# Altium PCB MB1710051255.PcbDoc (part 3 of 4)
Units mm, origin at the board's own origin, x right, y up, seen from the top; angles counter-clockwise.
Board outline 209.55 x 153.67 mm, 2 copper layers (Top Layer, Bottom Layer); 288 components, 212 nets, 1030 pads, 414 vias.
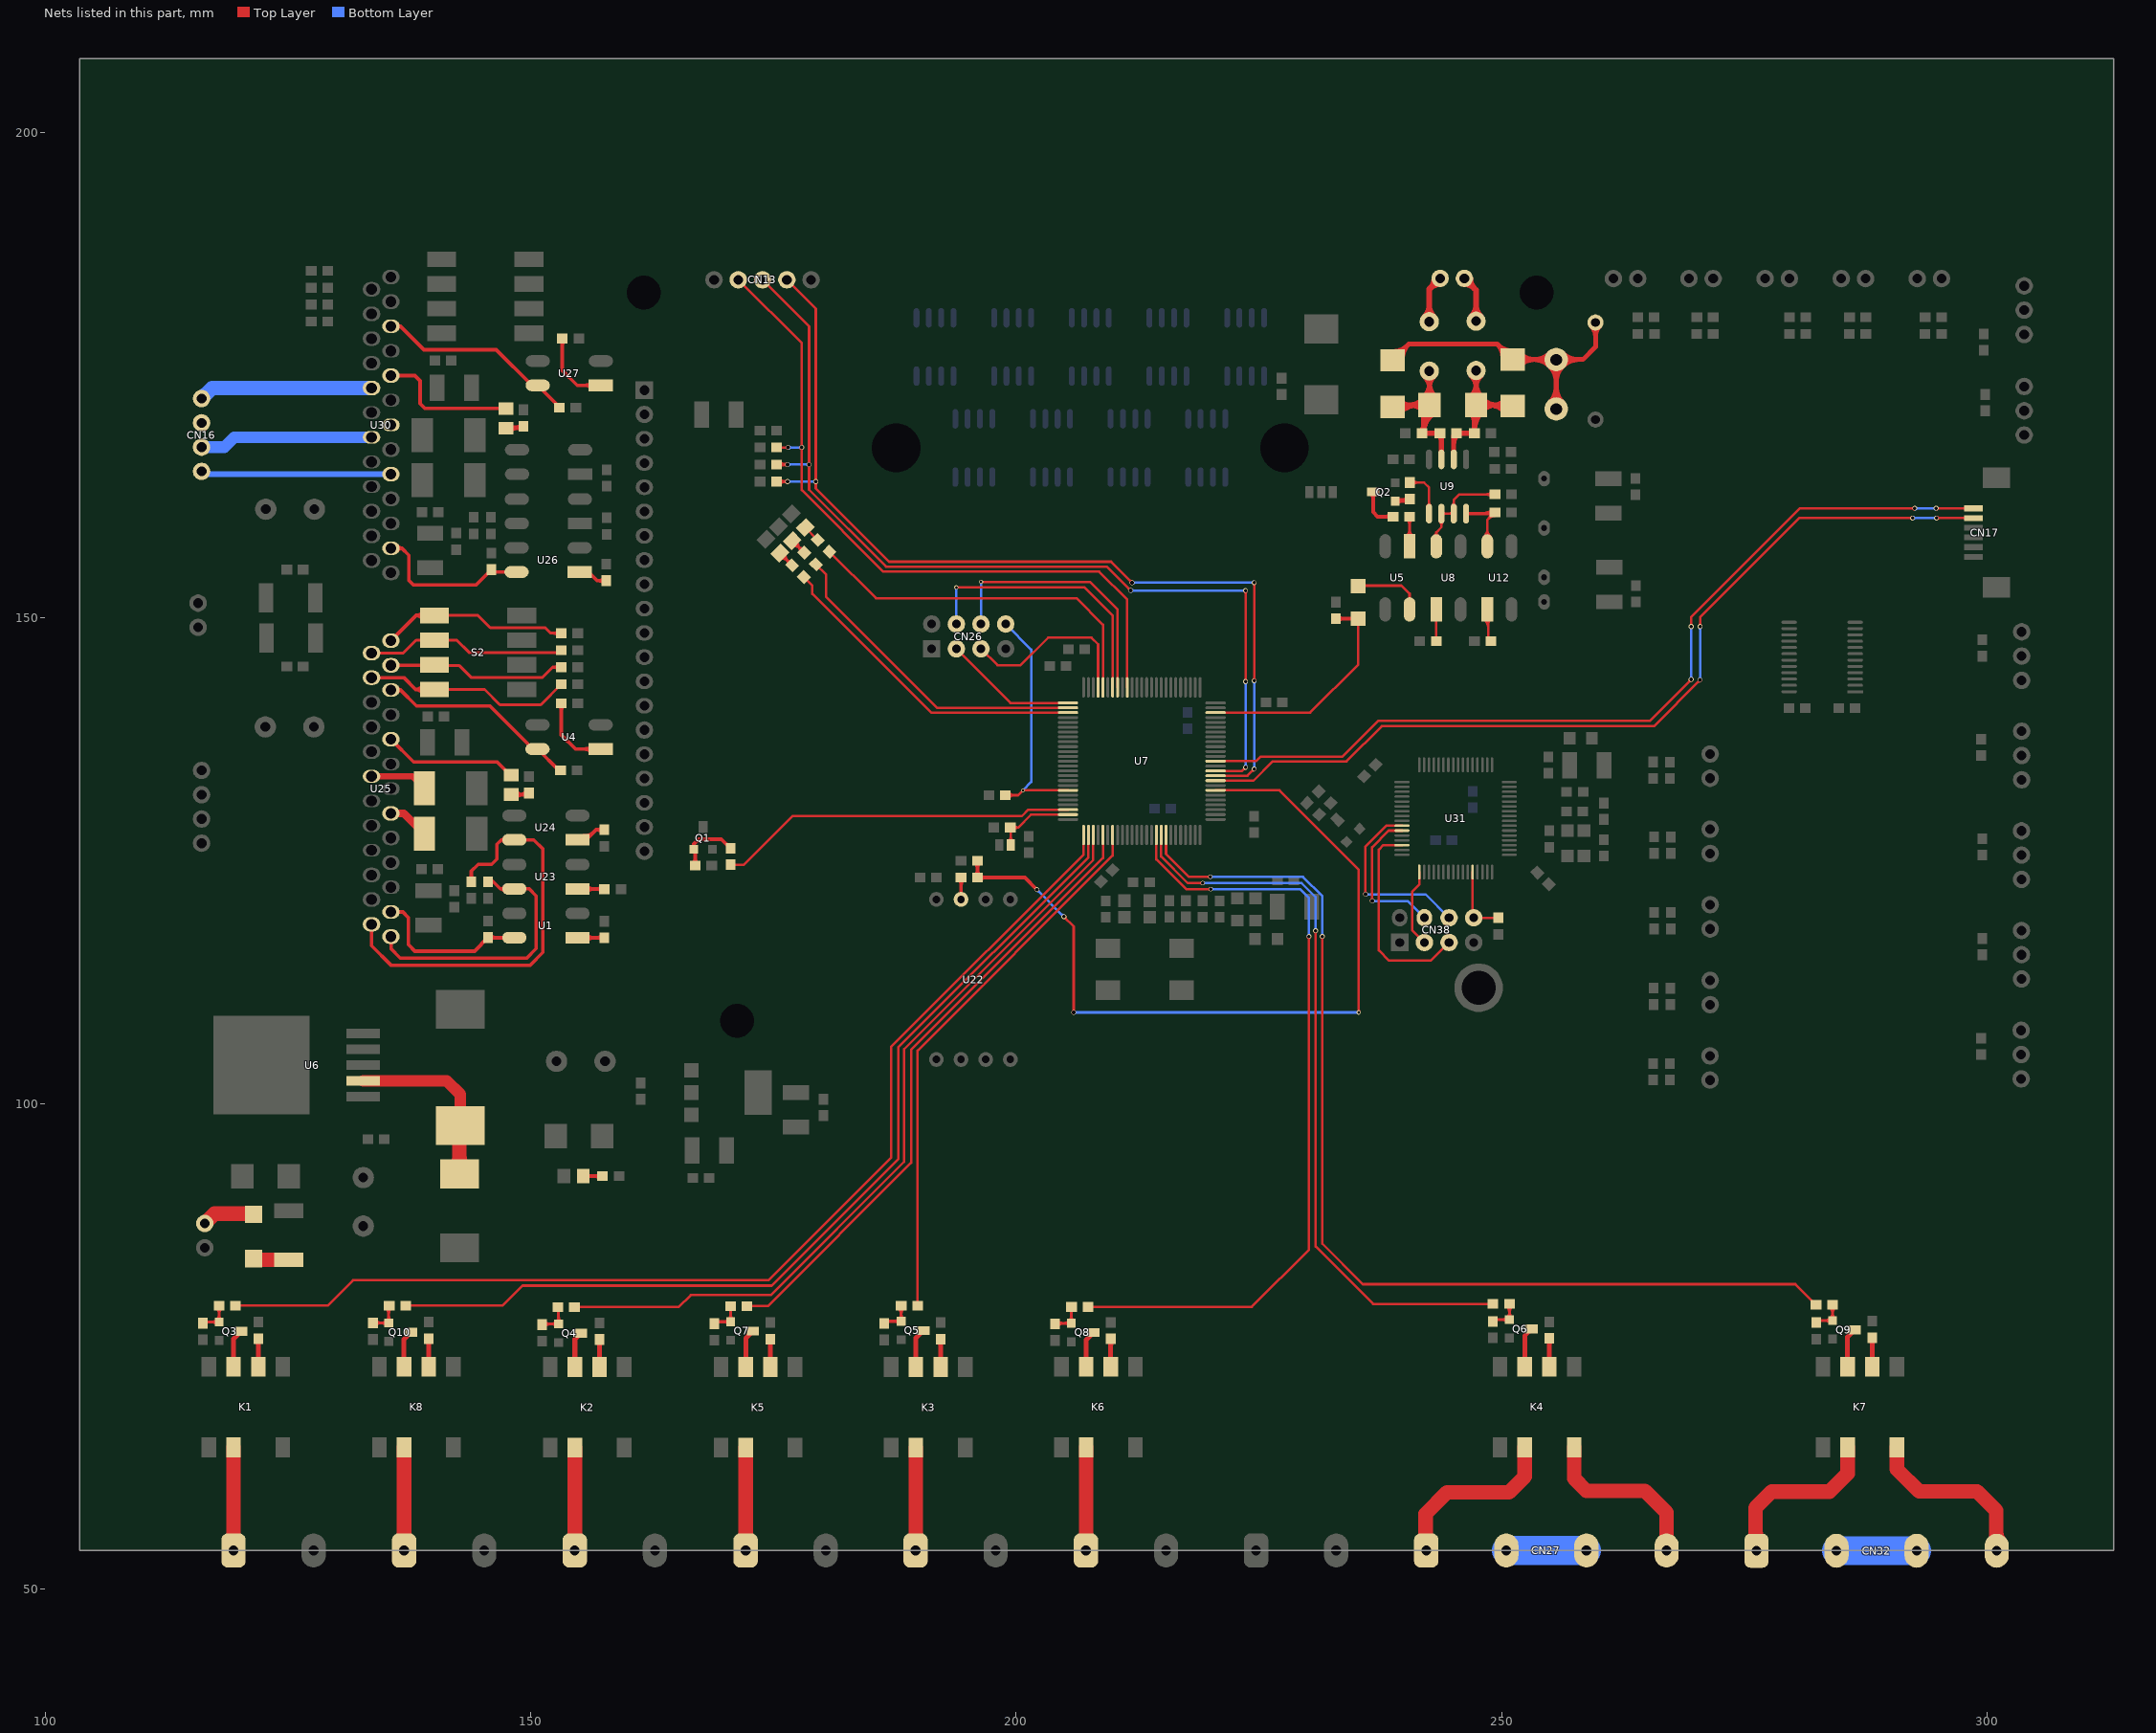
[diagram p3: the nets of this part, all layers, seen from the top]

## Via types
v1: diameter 0.7, hole 0.5, Top Layer to Bottom Layer, 231 vias
v2: diameter 0.5, hole 0.38, Top Layer to Bottom Layer, 67 vias
v3: diameter 0.5, hole 0.35, Top Layer to Bottom Layer, 64 vias
v4: diameter 0.42, hole 0.3, Top Layer to Bottom Layer, 27 vias
v5: diameter 0.45, hole 0.32, Top Layer to Bottom Layer, 8 vias
v6: diameter 0.8, hole 0.6, Top Layer to Bottom Layer, 8 vias
v7: diameter 1, hole 0.8, Top Layer to Bottom Layer, 4 vias
v8: diameter 0.45, hole 0.35, Top Layer to Bottom Layer, 3 vias
v9: diameter 1.2, hole 1, Top Layer to Bottom Layer, 1 vias
v10: diameter 0.6, hole 0.45, Top Layer to Bottom Layer, 1 vias

## Nets (pads, with @x,y where several pads share a name; then routed paths per layer and width w, separated by ;. In a path a pad name is that pad's centre, name@x,y a point inside that pad or via, vN(x,y) a via of type N, cw(c..) or ccw(c..) an arc to the next point about the centre after c; other vN are vias at no path point) (continued)
NetCN13_2: CN13.2 R16.1 U7.66 | length 76.5
  Top Layer w0.254: CN13.2@171.37,184.844 177.902,178.312 177.902,163.195 186.309,154.788 208.534,154.788 211.428,151.893 U7.66@211.428,142.855 ; R16.1@175.311,167.564 v2(176.505,167.564) ; v2@176.418,167.477 ccw(c176.208,167.267) 176.208,167.564 ccw(c176.208,167.861) v2@176.418,167.651 ; v2@177.815,167.477 cw(c177.605,167.267) 177.902,167.267 cw(c178.199,167.267) v2@177.989,167.477 ; v2@177.815,167.651 ccw(c177.605,167.861) 177.902,167.861 ccw(c178.199,167.861) v2@177.989,167.651
  Bottom Layer w0.254: v2(176.505,167.564) v2(177.902,167.564) ; v2@176.592,167.477 cw(c176.802,167.267) 176.802,167.564 cw(c176.802,167.861) v2@176.592,167.651 ; v2@177.815,167.477 ccw(c177.605,167.267) 177.605,167.564 ccw(c177.605,167.861) v2@177.815,167.651
NetCN13_3: CN13.3 R17.1 U7.36 | length 105.9
  Top Layer w0.254: CN13.3@173.87,184.844 178.664,180.05 178.664,163.22 186.588,155.296 209.321,155.296 v2(211.785,152.832) ; R17.1@175.311,165.811 v2(176.428,165.811) ; R17.1@175.625,165.547 cw(c176.261,164.911) 176.261,165.811 cw(c176.261,166.712) R17.1@175.625,166.075 ; 176.03,165.749 cw(c176.145,165.32) v2@176.367,165.705 ; 176.03,165.873 ccw(c176.145,166.303) v2@176.367,165.918 ; v2@176.341,165.724 ccw(c176.131,165.514) 176.131,165.811 ccw(c176.131,166.108) v2@176.341,165.898 ; v2@178.577,165.724 cw(c178.367,165.514) 178.664,165.514 cw(c178.961,165.514) v2@178.751,165.724 ; v2@178.577,165.898 ccw(c178.367,166.108) 178.664,166.108 ccw(c178.961,166.108) v2@178.751,165.898 ; v2@211.662,152.832 ccw(c211.365,152.832) 211.575,153.042 ccw(c211.785,153.252) v2@211.785,152.955 ; U7.36@220.528,134.255 223.257,134.255 v3(223.622,134.62) ; v3@223.499,134.62 cw(c223.202,134.62) 223.412,134.41 cw(c223.622,134.2) v3@223.622,134.497 ; v3@223.535,143.546 ccw(c223.325,143.756) 223.622,143.756 ccw(c223.919,143.756) v3@223.709,143.546 ; v3@223.535,152.745 cw(c223.325,152.535) 223.622,152.535 cw(c223.919,152.535) v3@223.709,152.745 ; v3(223.622,143.459) v3(223.622,152.832)
  Bottom Layer w0.254: v2(176.428,165.811) v2(178.664,165.811) ; v2@176.515,165.724 cw(c176.725,165.514) 176.725,165.811 cw(c176.725,166.108) v2@176.515,165.898 ; v2@178.577,165.724 ccw(c178.367,165.514) 178.367,165.811 ccw(c178.367,166.108) v2@178.577,165.898 ; v2(211.785,152.832) v3(223.622,152.832) ; v2@211.872,152.745 cw(c212.082,152.535) 212.082,152.832 cw(c212.082,153.129) v2@211.872,152.919 ; v3@223.535,134.707 ccw(c223.325,134.917) 223.622,134.917 ccw(c223.919,134.917) v3@223.709,134.707 ; v3@223.535,143.372 cw(c223.325,143.162) 223.622,143.162 cw(c223.919,143.162) v3@223.709,143.372 ; v3@223.535,152.745 ccw(c223.325,152.535) 223.325,152.832 ccw(c223.325,153.129) v3@223.535,152.919 ; v3(223.622,134.62) v3(223.622,143.459)
NetCN13_4: CN13.4 R23.1 U7.35 | length 107.6
  Top Layer w0.254: R23.1@175.311,164.059 v2(176.428,164.059) ; R23.1@175.625,163.795 cw(c176.261,163.158) 176.261,164.059 cw(c176.261,164.959) R23.1@175.625,164.322 ; 176.03,163.996 cw(c176.145,163.567) v2@176.367,163.952 ; 176.03,164.121 ccw(c176.145,164.55) v2@176.367,164.165 ; v2@176.341,163.972 ccw(c176.131,163.762) 176.131,164.059 ccw(c176.131,164.356) v2@176.341,164.146 ; CN13.4@176.37,184.844 179.349,181.864 179.349,163.347 186.893,155.804 209.779,155.804 v2(211.938,153.645) ; v2@179.262,163.972 cw(c179.052,163.762) 179.349,163.762 cw(c179.646,163.762) v2@179.436,163.972 ; v2@179.262,164.146 ccw(c179.052,164.356) 179.349,164.356 ccw(c179.646,164.356) v2@179.436,164.146 ; v2@211.815,153.645 ccw(c211.518,153.645) 211.728,153.855 ccw(c211.938,154.065) v2@211.938,153.768 ; U7.35@220.528,133.755 223.823,133.755 v3(224.511,134.442) ; v3@224.388,134.442 cw(c224.091,134.442) 224.301,134.232 cw(c224.511,134.022) v3@224.511,134.319 ; v3@224.424,143.622 ccw(c224.214,143.832) 224.511,143.832 ccw(c224.808,143.832) v3@224.598,143.622 ; v3@224.424,153.558 cw(c224.214,153.348) 224.511,153.348 cw(c224.808,153.348) v3@224.598,153.558 ; v3(224.511,143.535) v3(224.511,153.645)
  Bottom Layer w0.254: v2(176.428,164.059) v2(179.349,164.059) ; v2@176.515,163.972 cw(c176.725,163.762) 176.725,164.059 cw(c176.725,164.356) v2@176.515,164.146 ; v2@179.262,163.972 ccw(c179.052,163.762) 179.052,164.059 ccw(c179.052,164.356) v2@179.262,164.146 ; v2(211.938,153.645) v3(224.511,153.645) ; v2@212.025,153.558 cw(c212.235,153.348) 212.235,153.645 cw(c212.235,153.942) v2@212.025,153.732 ; v3@224.424,134.529 ccw(c224.214,134.739) 224.511,134.739 ccw(c224.808,134.739) v3@224.598,134.529 ; v3@224.424,143.448 cw(c224.214,143.238) 224.511,143.238 cw(c224.808,143.238) v3@224.598,143.448 ; v3@224.424,153.558 ccw(c224.214,153.348) 224.214,153.645 ccw(c224.214,153.942) v3@224.424,153.732 ; v3(224.511,134.442) v3(224.511,143.535)
NetCN16_1: CN16.1 U30.16 | length 18
  Bottom Layer w1.5: CN16.1@116.086,172.608 117.18,173.702 U30.16@133.592,173.702
NetCN16_2: CN16.2 U30.13 | length 0.3
  Bottom Layer w0.6: CN16.2@116.086,170.108 CN16.2@116.302,169.892
NetCN16_3: CN16.3 U30.12 | length 17.9
  Bottom Layer w1.2: CN16.3@116.086,167.608 118.433,167.608 119.448,168.622 U30.12@133.592,168.622
NetCN16_4: CN16.4 U30.9 | length 19.6
  Bottom Layer w0.6: CN16.4@116.086,165.108 116.382,164.812 U30.9@135.592,164.812
NetCN17_5: CN17.5 U7.34 | length 97.5
  Top Layer w0.254: U7.34@220.528,133.255 224.441,133.255 226.416,135.23 234.01,135.23 237.635,138.854 265.676,138.854 v2(270.434,143.612) ; v2@270.311,143.612 cw(c270.014,143.612) 270.224,143.402 cw(c270.434,143.192) v2@270.434,143.489 ; v3@270.347,149.21 ccw(c270.137,149.42) 270.434,149.42 ccw(c270.731,149.42) v3@270.521,149.21 ; v3(270.434,149.123) 270.434,150.089 280.646,160.301 v3(292.33,160.301) ; v3@292.243,160.214 ccw(c292.033,160.004) 292.033,160.301 ccw(c292.033,160.598) v3@292.243,160.388 ; v3@294.792,160.299 v3(294.794,160.301) CN17.5@298.596,160.301 ; v3@294.881,160.214 cw(c295.091,160.004) 295.091,160.301 cw(c295.091,160.598) v3@294.881,160.388 ; CN17.5@297.823,160.178 ccw(c297.528,159.883) 297.528,160.301 ccw(c297.528,160.718) CN17.5@297.823,160.423
  Bottom Layer w0.254: v2@270.347,143.699 ccw(c270.137,143.909) 270.434,143.909 ccw(c270.731,143.909) v2@270.521,143.699 ; v3@270.347,149.036 cw(c270.137,148.826) 270.434,148.826 cw(c270.731,148.826) v3@270.521,149.036 ; v2(270.434,143.612) v3(270.434,149.123) ; v3@292.329,160.299 v3(292.33,160.301) v3(294.794,160.301) ; v3@292.417,160.214 cw(c292.627,160.004) 292.627,160.301 cw(c292.627,160.598) v3@292.417,160.388 ; v3@294.707,160.214 ccw(c294.497,160.004) 294.497,160.301 ccw(c294.497,160.598) v3@294.707,160.388
NetCN17_6: CN17.6 U7.38 | length 97
  Top Layer w0.254: U7.38@220.528,135.255 224.688,135.255 225.171,135.738 233.604,135.738 237.274,139.408 265.265,139.408 v2(269.519,143.662) ; v2@269.396,143.662 cw(c269.099,143.662) 269.309,143.452 cw(c269.519,143.242) v2@269.519,143.539 ; v3@269.432,149.21 ccw(c269.222,149.42) 269.519,149.42 ccw(c269.816,149.42) v3@269.606,149.21 ; v3(269.519,149.123) 269.519,150.114 280.706,161.301 v3(292.543,161.301) ; v3@292.456,161.214 ccw(c292.246,161.004) 292.246,161.301 ccw(c292.246,161.598) v3@292.456,161.388 ; v3(294.752,161.301) CN17.6@298.596,161.301 ; v3@294.839,161.214 cw(c295.049,161.004) 295.049,161.301 cw(c295.049,161.598) v3@294.839,161.388 ; CN17.6@297.823,161.178 ccw(c297.528,160.883) 297.528,161.301 ccw(c297.528,161.718) CN17.6@297.823,161.423
  Bottom Layer w0.254: v2@269.432,143.749 ccw(c269.222,143.959) 269.519,143.959 ccw(c269.816,143.959) v2@269.606,143.749 ; v3@269.432,149.036 cw(c269.222,148.826) 269.519,148.826 cw(c269.816,148.826) v3@269.606,149.036 ; v2(269.519,143.662) v3(269.519,149.123) ; v3@292.532,161.29 v3(292.543,161.301) v3(294.752,161.301) ; v3@292.63,161.214 cw(c292.84,161.004) 292.84,161.301 cw(c292.84,161.598) v3@292.63,161.388 ; v3@294.665,161.214 ccw(c294.455,161.004) 294.455,161.301 ccw(c294.455,161.598) v3@294.665,161.388
NetCN24_2: CN24.2 D2.1 | length 5.4
  Top Layer w1.5: CN24.2@116.408,87.635 117.419,88.646 D2.1@121.437,88.646
NetCN25_1: CN25.1 RT1.2 | length 9.8
  Top Layer w0.6: RT1.2@242.048,181.012 ccw(c240.869,182.191) 242.536,182.191 ccw(c244.204,182.191) RT1.2@243.025,181.012 ; RT1.2@242.536,180.524 242.536,183.868 CN25.1@243.657,184.988 ; CN25.1@243.057,184.988 cw(c241.608,184.988) 242.633,183.964 cw(c243.657,182.94) CN25.1@243.657,184.388
NetCN25_2: CN25.2 RT2.2 | length 9.8
  Top Layer w0.6: CN25.2@246.157,184.388 cw(c246.157,182.94) 247.181,183.964 cw(c248.205,184.988) CN25.2@246.757,184.988 ; CN25.2@246.157,184.988 247.362,183.783 RT2.2@247.362,180.575 ; RT2.2@246.874,181.063 ccw(c245.695,182.242) 247.362,182.242 ccw(c249.03,182.242) RT2.2@247.851,181.063
NetCN26_2: CN26.2 U7.76 | length 13.8
  Top Layer w0.254: CN26.2@193.827,146.837 199.41,141.255 U7.76@205.328,141.255
NetCN26_3: CN26.3 U7.72 | length 18.7
  Top Layer w0.254: CN26.3@196.367,146.837 198.069,145.136 200.431,145.136 203.276,147.98 207.747,147.98 208.428,147.299 U7.72@208.428,142.855
NetCN26_6: CN26.6 U7.69 | length 28.5
  Top Layer w0.254: v4(193.827,153.162) 207.035,153.162 209.928,150.269 U7.69@209.928,142.855
  Bottom Layer w0.254: CN26.6@193.827,149.377 v4(193.827,153.162)
NetCN26_7: CN26.7 U7.68 | length 27.6
  Top Layer w0.254: v4(196.367,153.721) 207.569,153.721 210.428,150.861 U7.68@210.428,142.855
  Bottom Layer w0.254: CN26.7@196.367,149.377 v4(196.367,153.721)
NetCN26_8: CN26.8 R44.2 U7.94 | length 26.6
  Top Layer w0.254: R44.2@198.88,131.75 200.177,131.75 v4(200.683,132.255) U7.94@205.328,132.255 ; R44.2@199.194,131.486 cw(c199.831,130.849) 199.831,131.75 cw(c199.831,132.65) R44.2@199.194,132.014
  Bottom Layer w0.254: CN26.8@198.907,149.377 201.549,146.736 201.549,133.121 v4(200.683,132.255)
NetCN27_1: CN27.1 K4.6 | length 19.7
  Top Layer w1.5: 242.164,55.819 ccw(c243.596,55.819) CN27.1@242.583,54.806 ; CN27.1@242.23,53.953 242.164,54.019 242.164,57.737 244.373,59.947 250.749,59.947 252.374,61.573 K4.6@252.374,64.586
NetCN27_2: CN27.2 CN27.3 | length 8.2
  Bottom Layer w3: CN27.2@250.48,53.953 CN27.3@258.73,53.953
NetCN27_4: CN27.4 K4.8 | length 18.1
  Top Layer w1.5: K4.8@257.454,64.586 257.454,61.37 258.724,60.1 264.744,60.1 266.98,57.864 CN27.4@266.98,53.953
NetCN28_1: CN28.1 K1.6 | length 10.6
  Top Layer w1.5: CN28.1@119.37,53.953 119.38,53.963 K1.6@119.38,64.586
NetCN29_1: CN29.1 K2.6 | length 10.6
  Top Layer w1.5: CN29.1@154.523,53.953 154.534,53.963 K2.6@154.534,64.561
NetCN30_1: CN30.1 K3.6 | length 11.7
  Top Layer w1.5: CN30.1@189.273,54.807 ccw(c188.333,55.746) 189.662,55.746 ; CN30.1@189.626,53.953 189.662,53.989 K3.6@189.662,64.561
NetCN32_1: CN32.1 K7.6 | length 19.3
  Top Layer w1.5: 276.149,55.855 ccw(c277.668,55.855) CN32.1@276.594,54.781 ; CN32.1@276.24,53.927 276.149,54.019 276.149,58.347 277.825,60.023 283.769,60.023 285.623,61.878 K7.6@285.623,64.586
NetCN32_2: CN32.2 CN32.3 | length 8.2
  Bottom Layer w3: CN32.2@284.49,53.927 CN32.3@292.74,53.927
NetCN32_4: CN32.4 K7.8 | length 19.5
  Top Layer w1.5: K7.8@290.703,64.586 290.703,62.335 292.989,60.049 298.958,60.049 300.939,58.068 300.939,53.978 CN32.4@300.99,53.927 ; 300.939,55.758 ccw(c302.32,55.758) CN32.4@301.344,54.781
NetCN33_1: CN33.1 K5.6 | length 10.6
  Top Layer w1.5: CN33.1@172.126,53.953 172.136,53.963 K5.6@172.136,64.561
NetCN34_1: CN34.1 K6.6 | length 10.6
  Top Layer w1.5: CN34.1@207.178,53.953 207.188,53.963 K6.6@207.188,64.586
NetCN35_1: CN35.1 K8.6 | length 10.6
  Top Layer w1.5: K8.6@136.931,64.586 136.931,53.968 CN35.1@136.947,53.953
NetCN37_2: CN37.2 R80.2 U7.99 | length 10.4
  Top Layer w0.254: CN37.2@199.224,127.006 ccw(c198.724,127.506) 199.431,127.506 ccw(c200.139,127.506) CN37.2@199.638,127.006 ; CN37.2@199.431,126.619 199.431,128.379 R80.2@199.388,128.422 200.177,128.422 ; R80.2@199.738,128.201 cw(c200.177,127.877) 200.177,128.422 ; R80.2@199.738,128.644 ccw(c200.177,128.968) 200.177,128.422 ; U7.99@205.328,129.755 201.51,129.755 200.177,128.422
NetCN38_2: CN38.2 U31.49 | length 8.1
  Top Layer w0.254: U31.49@241.506,123.83 241.506,122.557 240.767,121.818 240.767,117.856 CN38.2@242.037,116.586
NetCN38_3: CN38.3 U31.46 | length 21.4
  Top Layer w0.254: U31.46@239.731,126.605 237.806,126.605 237.338,126.136 237.338,115.773 238.404,114.706 242.697,114.706 CN38.3@244.577,116.586
NetCN38_6: CN38.6 U31.43 | length 16.4
  Top Layer w0.254: v2@236.565,120.94 ccw(c236.355,121.15) 236.652,121.15 ccw(c236.949,121.15) v2@236.739,120.94 ; v2(236.652,120.853) 236.652,126.39 238.367,128.105 U31.43@239.731,128.105
  Bottom Layer w0.254: v2(236.652,120.853) 240.309,120.853 CN38.6@242.037,119.126 ; v2@236.739,120.766 cw(c236.949,120.556) 236.949,120.853 cw(c236.949,121.15) v2@236.739,120.94
NetCN38_7: CN38.7 U31.42 | length 20.1
  Top Layer w0.254: v2@235.879,121.626 ccw(c235.669,121.836) 235.966,121.836 ccw(c236.263,121.836) v2@236.053,121.626 ; v2(235.966,121.539) 235.966,126.467 238.105,128.605 U31.42@239.731,128.605
  Bottom Layer w0.254: v2(235.966,121.539) 242.164,121.539 CN38.7@244.577,119.126 ; v2@236.053,121.452 cw(c236.263,121.242) 236.263,121.539 cw(c236.263,121.836) v2@236.053,121.626
NetCN38_8: CN38.8 R97.2 U31.60 | length 7.3
  Top Layer w0.254: U31.60@247.006,123.83 247.006,119.237 CN38.8@247.117,119.126 249.655,119.126 R97.2@249.657,119.124
NetD1_1: D1.1 R39.1 U7.48 | length 25
  Top Layer w0.254: U7.48@220.528,140.255 230.273,140.255 235.229,145.212 D1.1@235.229,149.936
  Top Layer w0.38: R39.1@232.918,149.936 D1.1@235.229,149.936 ; R39.1@233.137,149.717 cw(c233.666,149.188) 233.666,149.936 cw(c233.666,150.685) R39.1@233.137,150.155
NetD1_2: D1.2 U5.4 | length 7.3
  Top Layer w0.254: D1.2@235.229,153.289 235.28,153.34 239.674,153.34 240.508,152.506 U5.4@240.508,150.891
NetD2_2: D2.2 F1.1 | length 3.7
  Top Layer w1.5: D2.2@121.437,84.099 121.641,83.896 F1.1@125.044,83.896
NetD3_2: D3.2 L1.1 U6.2 | length 21.7
  Top Layer w1.2: U6.2@132.715,102.328 141.334,102.328 142.723,100.94 L1.1@142.723,97.708
  Top Layer w1.5: D3.2@142.116,93.256 ccw(c140.836,94.536) 142.646,94.536 ccw(c144.457,94.536) D3.2@143.177,93.256 ; D3.2@142.646,92.725 142.646,97.632 L1.1@142.723,97.708
NetD6_1: D6.1 D7.2 R42.2 R47.1 RT1.1 U9.7 | length 38.6
  Top Layer w0.5: D6.1@238.76,171.755 238.963,171.958 D7.2@242.57,171.958 ; D6.1@239.143,171.472 cw(c240.316,170.299) 240.316,171.958 ; D6.1@239.496,171.118 cw(c241.523,169.091) D7.2@241.523,171.958 ; D6.1@239.496,172.391 ccw(c240.542,173.437) 240.542,171.958 ; R42.2@241.654,169.214 ccw(c240.98,169.888) 241.933,169.888 ; R42.2@241.933,168.966 cw(c244.523,168.966) D7.2@243.074,171.112 ; 241.933,169.907 cw(c243.887,169.907) D7.2@242.794,171.526 ; D7.2@241.933,170.848 cw(c243.252,170.848) D7.2@242.514,171.941 ; D7.2@241.934,172.594 cw(c240.397,174.131) 240.397,171.958 cw(c240.397,169.785) D7.2@241.934,171.322 ; D7.2@241.934,172.694 ccw(c240.397,174.231) 242.57,174.231 ccw(c244.743,174.231) D7.2@243.206,172.694 ; R42.2@242.008,168.86 cw(c242.434,168.433) 242.434,169.037 cw(c242.434,169.641) R42.2@242.008,169.214 ; RT1.1@242.013,174.92 cw(c240.667,173.575) 242.57,173.575 ; RT1.1@242.536,175.444 242.57,175.41 D7.2@242.57,171.958 ; 242.57,173.737 cw(c244.243,173.737) RT1.1@243.06,174.92 ; R47.1@243.41,168.86 ccw(c242.983,168.433) 242.983,169.037 ccw(c242.983,169.641) R47.1@243.41,169.214 ; R47.1@243.51,168.86 cw(c242.836,168.186) 243.789,168.186 ; U9.7@243.789,166.345 243.789,169.012 243.815,169.037 241.933,169.037 D7.2@241.933,171.321 ; D7.2@241.933,171.321 D7.2@242.57,171.958
NetD6_2: D6.2 D8.2 JDOT1.1 JDOT1.2 L2.1 | length 57.1
  Top Layer w0.5: D6.2@238.76,176.555 240.436,178.232 ; D6.2@238.86,177.455 ccw(c238.86,179.387) 240.226,178.021 ; D6.2@239.76,176.567 cw(c242.07,176.598) 240.436,178.232 ; 249.664,178.097 ccw(c251.03,179.463) D8.2@251.03,177.532 ; D8.2@250.131,176.675 ccw(c248.073,176.775) 249.53,178.232 ; D8.2@251.866,175.995 cw(c253.403,174.459) 253.403,176.632 cw(c253.403,178.804) D8.2@251.866,177.268 ; 253.262,176.632 cw(c253.262,174.257) 254.941,175.936 cw(c253.308,174.303) 255.617,174.303 cw(c257.927,174.303) 256.294,175.936 cw(c257.973,174.257) 257.973,176.632 ; 253.354,176.632 ccw(c253.354,178.875) JDOT1.2@254.941,177.289 ; JDOT1.1@254.941,172.209 ccw(c253.308,173.842) 255.617,173.842 ccw(c257.927,173.842) JDOT1.1@256.294,172.209 ; JDOT1.1@255.617,171.532 JDOT1.2@255.617,176.612 ; JDOT1.2@256.294,177.289 ccw(c257.88,178.875) 257.88,176.632 ; L2.1@259.257,180.035 cw(c258.275,179.052) 259.664,179.052 cw(c261.054,179.052) L2.1@260.071,180.035 ; L2.1@259.664,180.442 259.664,177.927 258.369,176.632 D8.2@251.13,176.632 249.53,178.232 ; 240.436,178.232 249.53,178.232
NetD7_1: D7.1 D8.1 R47.2 R52.1 RT2.1 U9.6 | length 37.7
  Top Layer w0.5: U9.6@245.059,166.345 245.059,168.759 R47.2@245.337,169.037 R52.1@247.193,169.037 247.193,171.78 D7.1@247.371,171.958 ; 245.059,167.884 cw(c246.44,167.884) R47.2@245.464,168.86 ; R47.2@245.564,168.86 cw(c245.99,168.433) 245.99,169.037 cw(c245.99,169.641) R47.2@245.564,169.214 ; D7.1@246.734,171.222 cw(c245.627,170.114) 247.193,170.114 ; D7.1@246.734,172.694 ccw(c245.198,174.231) 247.371,174.231 ccw(c249.543,174.231) D7.1@248.007,172.694 ; RT2.1@246.839,174.971 cw(c245.554,173.687) 247.371,173.687 ; R52.1@246.966,168.86 ccw(c246.539,168.433) 246.539,169.037 ccw(c246.539,169.641) R52.1@246.966,169.214 ; R52.1@247.016,169.214 ccw(c246.589,169.641) 247.193,169.641 ccw(c247.796,169.641) R52.1@247.37,169.214 ; R52.1@247.193,169.256 cw(c249.973,169.256) D7.1@248.007,171.222 ; 247.193,170.463 cw(c248.766,170.463) D7.1@247.653,171.575 ; RT2.1@247.362,175.495 247.371,175.487 D7.1@247.371,171.958 ; 247.371,173.727 cw(c249.13,173.727) RT2.1@247.886,174.971 ; D7.1@248.007,171.322 cw(c249.543,169.785) 249.543,171.958 cw(c249.543,174.131) D7.1@248.007,172.594 ; 248.55,171.958 cw(c248.55,169.352) D8.1@250.393,171.195 ; 249.164,171.958 ccw(c249.164,173.697) D8.1@250.393,172.467 ; 249.758,171.958 cw(c249.758,170.559) D8.1@250.747,171.548 ; D8.1@251.13,171.831 251.003,171.958 D7.1@247.371,171.958
NetDS1_1: DS1.1 R18.1 | length 1.8
  Top Layer w0.254: DS1.1@178.261,159.326 R18.1@179.547,158.039
NetDS2_1: DS2.1 R19.1 | length 5.2
  Top Layer w0.254: DS2.1@176.914,157.455 cw(c176.914,156.193) 177.806,157.086 cw(c178.699,157.978) DS2.1@177.437,157.978 ; DS2.1@176.914,157.978 R19.1@178.164,156.728 ; R19.1@177.756,156.763 ccw(c176.855,156.763) 177.492,157.4 ccw(c178.129,158.037) R19.1@178.129,157.136
NetDS3_1: DS3.1 R20.1 | length 5.2
  Top Layer w0.254: DS3.1@175.638,156.18 cw(c175.638,154.918) 176.531,155.81 cw(c177.424,156.703) DS3.1@176.161,156.703 ; DS3.1@175.638,156.703 R20.1@176.907,155.435 ; R20.1@176.499,155.47 ccw(c175.598,155.47) 176.235,156.107 ccw(c176.872,156.744) R20.1@176.872,155.843
NetDS4_2: DS4.2 R45.2 | length 3.1
  Top Layer w0.38: DS4.2@155.407,92.507 R45.2@157.38,92.507 ; R45.2@157.111,92.288 ccw(c156.582,91.758) 156.582,92.507 ccw(c156.582,93.255) R45.2@157.111,92.726
NetDS5_1: DS5.1 R8.1 | length 4.5
  Top Layer w0.38: DS5.1@147.98,131.817 149.647,131.817 R8.1@149.809,131.978 ; DS5.1@148.406,131.491 cw(c149.191,130.706) 149.191,131.817 cw(c149.191,132.927) DS5.1@148.406,132.142 ; 148.791,131.817 ccw(c148.791,132.947) R8.1@149.59,132.148
NetDS5_2: DS5.2 U25.17 | length 14
  Top Layer w0.38: U25.17@135.592,137.507 137.92,135.179 146.523,135.179 146.523,135.172 DS5.2@147.98,133.715
NetDS6_1: DS6.1 R83.1 | length 5.7
  Top Layer w0.38: DS6.1@147.447,169.561 149.038,169.561 R83.1@149.225,169.748 ; DS6.1@147.872,169.236 cw(c148.658,168.45) 148.658,169.561 cw(c148.658,170.672) DS6.1@147.872,169.886 ; DS6.1@147.907,169.848 ccw(c148.348,170.201) 148.495,169.655 ; DS6.1@147.945,169.331 cw(c148.449,169.04) 148.299,169.602 ; DS6.1@148.145,169.561 ccw(c148.145,170.778) R83.1@149.006,169.917
NetDS6_2: DS6.2 U30.17 | length 14.5
  Top Layer w0.38: U30.17@135.592,174.972 138.058,174.972 138.608,174.422 138.608,172.085 139.09,171.602 DS6.2@147.311,171.602
NetK1_2: K1.2 R53.2 | length 3.8
  Top Layer w0.5: R53.2@121.743,75.546 cw(c121.316,75.12) 121.92,75.12 cw(c122.524,75.12) R53.2@122.097,75.546 ; K1.2@121.92,72.886 R53.2@121.92,75.773
NetK1_3: K1.3 Q3.3 | length 4
  Top Layer w0.5: K1.3@119.38,72.886 119.38,75.746 Q3.3@120.167,76.533
NetK2_2: K2.2 R54.2 | length 3.8
  Top Layer w0.5: R54.2@156.897,75.47 cw(c156.47,75.043) 157.074,75.043 cw(c157.677,75.043) R54.2@157.25,75.47 ; K2.2@157.074,72.861 R54.2@157.074,75.697
NetK2_3: K2.3 Q4.3 | length 3.7
  Top Layer w0.5: K2.3@154.534,72.861 154.534,75.721 Q4.3@155.143,76.33
NetK3_2: K3.2 R55.2 | length 3.8
  Top Layer w0.5: R55.2@192.025,75.496 cw(c191.598,75.069) 192.202,75.069 cw(c192.805,75.069) R55.2@192.379,75.496 ; K3.2@192.202,72.861 R55.2@192.202,75.722
NetK3_3: K3.3 Q5.3 | length 4.1
  Top Layer w0.5: K3.3@189.662,72.861 189.662,75.848 Q5.3@190.424,76.61
NetK4_2: K4.2 R56.2 | length 4
  Top Layer w0.5: R56.2@254.738,75.572 cw(c254.311,75.145) 254.914,75.145 cw(c255.518,75.145) R56.2@255.091,75.572 ; K4.2@254.914,72.886 R56.2@254.914,75.976
NetK4_3: K4.3 Q6.3 | length 4.2
  Top Layer w0.5: K4.3@252.374,72.886 252.374,76.076 Q6.3@253.086,76.787
NetK5_2: K5.2 R66.2 | length 3.8
  Top Layer w0.5: R66.2@174.499,75.496 cw(c174.072,75.069) 174.676,75.069 cw(c175.279,75.069) R66.2@174.853,75.496 ; K5.2@174.676,72.861 R66.2@174.676,75.722
NetK5_3: K5.3 Q7.3 | length 4
  Top Layer w0.5: K5.3@172.136,72.861 172.136,75.822 Q7.3@172.872,76.559
NetK6_2: K6.2 R67.2 | length 3.8
  Top Layer w0.5: R67.2@209.551,75.521 cw(c209.124,75.094) 209.728,75.094 cw(c210.331,75.094) R67.2@209.905,75.521 ; K6.2@209.728,72.886 R67.2@209.728,75.748
NetK6_3: K6.3 Q8.3 | length 3.8
  Top Layer w0.5: K6.3@207.188,72.886 207.188,75.644 Q8.3@207.95,76.406
NetK7_2: K7.2 R68.2 | length 3.9
  Top Layer w0.5: R68.2@287.986,75.648 cw(c287.559,75.221) 288.163,75.221 cw(c288.767,75.221) R68.2@288.34,75.648 ; K7.2@288.163,72.886 R68.2@288.163,75.875
NetK7_3: K7.3 Q9.3 | length 4.1
  Top Layer w0.5: K7.3@285.623,72.886 285.623,75.949 Q9.3@286.36,76.686
NetK8_2: K8.2 R69.2 | length 3.8
  Top Layer w0.5: R69.2@139.295,75.546 cw(c138.868,75.12) 139.471,75.12 cw(c140.075,75.12) R69.2@139.648,75.546 ; K8.2@139.471,72.886 R69.2@139.471,75.722
NetK8_3: K8.3 Q10.3 | length 3.8
  Top Layer w0.5: K8.3@136.931,72.886 136.931,75.721 Q10.3@137.643,76.432
NetQ1_1: Q1.1 R21.1 R25.1 | length 8.5
  Top Layer w0.38: Q1.1@166.633,126.404 ccw(c166.415,126.708) 166.789,126.708 ; R25.1@166.71,124.73 ccw(c166.18,125.259) 166.929,125.259 ccw(c167.677,125.259) R25.1@167.148,124.73 ; R25.1@166.929,124.511 166.929,126.047 Q1.1@166.789,126.187 166.789,126.708 ; Q1.1@166.945,126.404 cw(c167.163,126.708) 166.789,126.708 ; R21.1@170.561,126.289 169.621,127.229 167.31,127.229 166.789,126.708
NetQ2_1: Q2.1 R41.2 | length 4.6
  Top Layer w0.38: Q2.1@238.811,162.039 240.32,162.039 R41.2@240.538,162.257 ; Q2.1@239.173,162.271 ccw(c239.648,163.094) 239.894,162.176 ; Q2.1@239.228,161.85 cw(c239.684,161.394) 239.684,162.039 cw(c239.684,162.684) Q2.1@239.228,162.228 ; Q2.1@239.385,162.039 ccw(c239.385,163.36) R41.2@240.319,162.426
NetQ2_3: Q2.3 R40.1 | length 6.5
  Top Layer w0.38: Q2.3@236.564,162.803 cw(c236.108,162.347) 236.753,162.347 cw(c237.398,162.347) Q2.3@236.942,162.803 ; Q2.3@236.753,162.992 236.753,160.909 237.211,160.452 R40.1@238.811,160.452 ; R40.1@238.542,160.233 ccw(c238.012,159.703) 238.012,160.452 ccw(c238.012,161.2) R40.1@238.542,160.671
NetQ3_1: Q3.1 R57.2 R61.1 | length 7
  Top Layer w0.3: R61.1@116.23,77.372 116.345,77.486 Q3.1@117.881,77.486 117.881,79.173 R57.2@117.883,79.175 ; R57.2@117.636,78.928 cw(c117.043,78.334) 117.881,78.334 ; Q3.1@117.664,77.269 ccw(c117.14,76.744) 117.14,77.486 ccw(c117.14,78.228) 117.664,77.703 ccw(c117.14,78.228) 117.881,78.228 ccw(c118.623,78.228) Q3.1@118.099,77.703 ; 117.881,78.326 cw(c118.733,78.326) R57.2@118.131,78.928
NetQ4_1: Q4.1 R58.2 R62.1 | length 7.2
  Top Layer w0.3: R62.1@151.155,77.219 151.219,77.283 Q4.1@152.857,77.283 152.857,78.948 R58.2@152.783,79.023 ; R62.1@151.403,77.022 cw(c152.033,76.392) 152.033,77.283 ; R62.1@151.403,77.517 ccw(c151.968,78.082) 151.968,77.283 ; Q4.1@152.64,77.065 ccw(c152.116,76.541) 152.116,77.283 ccw(c152.116,78.024) 152.64,77.5 ccw(c152.116,78.024) 152.857,78.024 ccw(c153.599,78.024) Q4.1@153.074,77.5
NetQ5_1: Q5.1 R59.2 R63.1 | length 7.1
  Top Layer w0.3: R63.1@186.411,77.346 186.627,77.562 Q5.1@188.138,77.562 188.138,79.148 R59.2@188.14,79.15 ; R59.2@187.892,78.902 cw(c187.299,78.309) 188.138,78.309 ; Q5.1@187.921,77.345 ccw(c187.396,76.82) 187.396,77.562 ccw(c187.396,78.304) 187.921,77.779 ccw(c187.396,78.304) 188.138,78.304 ccw(c188.879,78.304) Q5.1@188.355,77.779 ; 188.138,78.3 cw(c188.989,78.3) R59.2@188.387,78.902
NetQ6_1: Q6.1 R60.2 R64.1 | length 7.1
  Top Layer w0.3: R64.1@249.098,77.549 249.288,77.74 Q6.1@250.8,77.74 250.8,79.351 R60.2@250.798,79.353 ; R60.2@250.55,79.105 cw(c249.948,78.503) 250.8,78.503 ; Q6.1@250.582,77.523 ccw(c250.058,76.998) 250.058,77.74 ccw(c250.058,78.482) 250.582,77.957 ccw(c250.058,78.482) 250.8,78.482 ccw(c251.541,78.482) Q6.1@251.017,77.957 ; 250.8,78.512 cw(c251.638,78.512) R60.2@251.045,79.105
NetQ7_1: Q7.1 R70.2 R74.1 | length 5.7
  Top Layer w0.3: R74.1@168.885,77.321 169.075,77.511 Q7.1@170.586,77.511 170.586,79.101 R70.2@170.563,79.124 ; Q7.1@170.369,77.294 ccw(c169.845,76.77) 169.845,77.511 ccw(c169.845,78.253) 170.369,77.729 ccw(c169.845,78.253) 170.586,78.253 ccw(c171.328,78.253) Q7.1@170.804,77.729
NetQ8_1: Q8.1 R71.2 R75.1 | length 7.1
  Top Layer w0.3: R75.1@203.987,77.295 204.051,77.359 Q8.1@205.664,77.359 205.664,79.021 R71.2@205.691,79.048 ; R75.1@204.235,77.098 cw(c204.865,76.468) 204.865,77.359 ; R75.1@204.235,77.593 ccw(c204.8,78.158) 204.8,77.359 ; Q8.1@205.447,77.142 ccw(c204.922,76.617) 204.922,77.359 ccw(c204.922,78.101) 205.447,77.576 ccw(c204.922,78.101) 205.664,78.101 ccw(c206.405,78.101) Q8.1@205.881,77.576
NetQ9_1: Q9.1 R72.2 R76.1 | length 7
  Top Layer w0.3: R76.1@282.397,77.422 282.613,77.638 Q9.1@284.074,77.638 284.074,79.249 R72.2@284.072,79.251 ; R72.2@283.824,79.004 cw(c283.222,78.402) 284.074,78.402 ; Q9.1@283.856,77.421 ccw(c283.332,76.897) 283.332,77.638 ccw(c283.332,78.38) 283.856,77.856 ccw(c283.332,78.38) 284.074,78.38 ccw(c284.815,78.38) Q9.1@284.291,77.856 ; 284.074,78.411 cw(c284.912,78.411) R72.2@284.319,79.004
NetQ10_1: Q10.1 R73.2 R78.1 | length 8.4
  Top Layer w0.3: R78.1@133.731,77.397 133.744,77.384 Q10.1@135.357,77.384 135.357,79.122 R73.2@135.409,79.175 ; R78.1@133.978,77.15 cw(c134.545,76.583) 134.545,77.384 ; R78.1@133.978,77.644 ccw(c134.607,78.273) 134.607,77.384 ; R73.2@135.112,78.928 cw(c134.521,78.336) 135.357,78.336 ; Q10.1@135.139,77.167 ccw(c134.615,76.643) 134.615,77.384 ccw(c134.615,78.126) 135.139,77.602 ccw(c134.615,78.126) 135.357,78.126 ccw(c136.098,78.126) Q10.1@135.574,77.602 ; 135.357,78.324 cw(c136.21,78.324) R73.2@135.607,78.928
NetR6_1: R6.1 U1.1 | length 5.5
  Top Layer w0.38: U1.1@154.8,117.073 157.552,117.073 R6.1@157.556,117.069 ; U1.1@155.74,116.783 cw(c156.44,116.083) 156.44,117.073 cw(c156.44,118.063) U1.1@155.74,117.363 ; 156.798,117.073 cw(c156.798,116.31) R6.1@157.337,116.849 ; 156.818,117.073 ccw(c156.818,117.807) R6.1@157.337,117.288
NetR7_2: R7.2 U1.4 U25.3 | length 17.8
  Top Layer w0.38: U25.3@135.592,119.727 136.813,119.727 137.389,119.151 137.389,116.357 138.049,115.697 144.194,115.697 R7.2@145.593,117.096 145.616,117.073 U1.4@148.3,117.073 ; R7.2@145.812,116.877 cw(c146.286,116.403) 146.286,117.073 ; R7.2@145.812,117.315 ccw(c146.397,117.9) 146.397,117.073
NetR9_1: R9.1 U4.1 | length 10.6
  Top Layer w0.38: R9.1@152.917,140.979 cw(c152.388,140.45) 153.137,140.45 cw(c153.885,140.45) R9.1@153.356,140.979 ; R9.1@153.137,141.199 153.137,137.973 154.606,136.504 U4.1@157.187,136.504 ; U4.1@156.247,136.214 ccw(c155.548,135.514) 155.548,136.504 ccw(c155.548,137.494) U4.1@156.247,136.794
NetR10_1: R10.1 U4.4 U25.21 | length 21.7
  Top Layer w0.38: U25.21@135.592,142.587 136.584,142.587 ; U25.21@136.256,142.377 cw(c136.584,142.225) 136.584,142.587 ; U25.21@136.256,142.797 ccw(c136.584,142.949) 136.584,142.587 ; R10.1@153.06,134.315 152.876,134.315 U4.4@150.687,136.504 150.211,136.504 145.771,140.945 138.227,140.945 136.584,142.587
NetR12_1: R12.1 U23.1 | length 5.5
  Top Layer w0.38: U23.1@154.8,122.102 157.535,122.102 R12.1@157.556,122.123 ; U23.1@155.74,121.812 cw(c156.44,121.112) 156.44,122.102 cw(c156.44,123.092) U23.1@155.74,122.392 ; 156.712,122.102 cw(c156.712,121.253) R12.1@157.312,121.853 ; 156.855,122.102 ccw(c156.855,122.749) R12.1@157.312,122.292
NetR13_2: R13.2 U23.4 U25.1 | length 29.2
  Top Layer w0.35: U25.1@135.592,117.187 135.592,115.944 136.55,114.986 149.581,114.986 150.546,115.951 150.546,121.387 149.83,122.102 U23.4@148.3,122.102 146.859,122.102 ; R13.2@145.593,123.163 145.798,123.163 146.859,122.102 ; U23.4@147.295,121.867 ccw(c146.859,121.578) 146.859,122.102 ; U23.4@147.295,122.337 cw(c146.859,122.626) 146.859,122.102
NetR14_1: R14.1 U24.1 | length 5.6
  Top Layer w0.38: U24.1@154.8,127.157 155.706,127.157 156.743,128.194 R14.1@157.556,128.194 ; U24.1@155.45,127.567 ccw(c155.45,129.175) 156.587,128.038 ; R14.1@157.337,127.975 ccw(c156.808,127.445) 156.808,128.194 ccw(c156.808,128.942) R14.1@157.337,128.413
NetR18_2: R18.2 U7.71 | length 37.8
  Top Layer w0.254: R18.2@180.749,156.837 185.542,152.044 206.197,152.044 208.928,149.313 U7.71@208.928,142.855
NetR19_2: R19.2 U7.77 | length 33.4
  Top Layer w0.254: R19.2@179.366,155.526 180.391,154.501 180.391,152.197 191.833,140.755 U7.77@205.328,140.755
NetR20_2: R20.2 U7.78 | length 33.5
  Top Layer w0.254: R20.2@178.109,154.233 178.994,153.348 178.994,152.502 191.24,140.255 U7.78@205.328,140.255
NetR21_2: R21.2 U7.98 | length 37.1
  Top Layer w0.254: R21.2@170.561,124.589 171.934,124.589 176.946,129.6 200.568,129.6 201.223,130.255 U7.98@205.328,130.255
NetR24_1: R24.1 U24.4 U25.2 | length 45
  Top Layer w0.35: U25.2@133.592,118.457 133.592,116.242 135.585,114.249 149.936,114.249 151.232,115.545 151.232,126.238 150.313,127.157 U24.4@148.3,127.157 146.969,127.157 ; R24.1@143.636,123.114 ccw(c143.081,123.669) 143.866,123.669 ccw(c144.65,123.669) R24.1@144.095,123.114 ; R24.1@143.866,122.834 143.866,123.927 144.577,124.638 145.974,124.638 146.507,125.171 146.507,126.695 146.969,127.157 ; U24.4@147.268,126.97 ccw(c146.969,126.823) 146.969,127.157 ; U24.4@147.268,127.343 cw(c146.969,127.49) 146.969,127.157
NetR26_2: R26.2 U25.11 | length 4.3
  Top Layer w0.8: U25.11@135.592,129.887 136.907,129.887 R26.2@139.032,127.762
NetR27_2: R27.2 U25.14 | length 6.7
  Top Layer w0.6: U25.14@133.592,133.697 137.796,133.697 ; R27.2@138.479,133.689 cw(c138.142,134.042) 137.796,133.697 ; R27.2@139.032,132.461 137.796,133.697
NetR28_2: R28.2 S2.8 U25.22 | length 23.3
  Top Layer w0.3: S2.8@140.073,142.646 145.237,142.646 146.812,141.072 151.028,141.072 R28.2@153.138,143.182
  Top Layer w0.38: U25.22@133.592,143.857 136.915,143.857 138.125,142.646 ; S2.8@138.891,142.272 ccw(c138.125,141.676) 138.125,142.646 ; S2.8@138.891,143.021 cw(c138.125,143.617) 138.125,142.646 ; S2.8@140.073,142.646 138.125,142.646
NetR34_2: R34.2 S2.7 U25.23 | length 19.8
  Top Layer w0.3: S2.7@140.073,145.127 142.604,145.127 143.835,143.896 151.212,143.896 152.248,144.932 ; R34.2@152.84,144.686 ccw(c152.248,144.098) 152.248,144.932 ; R34.2@152.84,145.179 cw(c152.248,145.767) 152.248,144.932 ; R34.2@153.138,144.932 152.248,144.932
  Top Layer w0.38: U25.23@135.592,145.127 S2.7@140.073,145.127
NetR35_2: R35.2 S2.6 U25.24 | length 20.7
  Top Layer w0.3: U25.24@133.592,146.397 136.847,146.397 138.176,147.726 S2.6@140.073,147.726 142.367,147.726 143.637,146.456 152.91,146.456 R35.2@153.138,146.685
NetR36_2: R36.2 S2.5 U25.25 | length 22.3
  Top Layer w0.3: S2.5@140.073,150.266 144.551,150.266 145.821,148.996 151.486,148.996 152.044,148.438 R36.2@153.113,148.438 ; R36.2@152.841,148.19 ccw(c152.243,147.593) 152.243,148.438 ccw(c152.243,149.283) R36.2@152.841,148.685 ; R36.2@153.138,148.412 R36.2@153.113,148.438 ; R36.2@153.138,148.438 R36.2@153.113,148.438
  Top Layer w0.38: U25.25@135.592,147.667 138.191,150.266 ; S2.5@138.875,149.913 ccw(c138.191,149.428) 138.191,150.266 ; S2.5@138.875,150.62 cw(c138.191,151.105) 138.191,150.266 ; S2.5@140.073,150.266 138.191,150.266
NetR37_1: R37.1 U26.1 | length 4.3
  Top Layer w0.38: U26.1@155.028,154.741 155.926,154.741 156.815,153.852 R37.1@157.764,153.852 ; R37.1@157.544,153.633 ccw(c157.015,153.104) 157.015,153.852 ccw(c157.015,154.6) R37.1@157.544,154.071
NetR38_2: R38.2 U26.4 U30.3 | length 17.9
  Top Layer w0.38: U30.3@135.592,157.192 136.711,157.192 ; U30.3@136.224,156.924 cw(c136.711,156.615) 136.711,157.192 ; U30.3@136.224,157.46 ccw(c136.711,157.769) 136.711,157.192 ; U26.4@148.528,154.741 146.175,154.741 R38.2@145.923,154.993 144.346,153.416 137.897,153.416 137.439,153.873 137.439,156.464 136.711,157.192
NetR40_2: R40.2 U5.1 | length 6.3
  Top Layer w0.254: U5.1@240.174,158.375 ccw(c239.366,159.183) 240.508,159.183 ccw(c241.65,159.183) U5.1@240.843,158.375 ; R40.2@240.247,160.188 cw(c239.616,159.557) 240.508,159.557 ; U5.1@240.508,157.391 240.508,160.449 R40.2@240.511,160.452 ; 240.508,159.546 cw(c241.417,159.546) R40.2@240.775,160.188
NetR41_1: R41.1 U9.1 | length 7
  Top Layer w0.254: R41.1@240.538,163.957 242.011,163.957 242.519,163.449 U9.1@242.519,160.757 ; R41.1@240.802,163.693 cw(c241.438,163.056) 241.438,163.957 cw(c241.438,164.857) R41.1@240.802,164.221 ; U9.1@242.384,161.59 ccw(c242.059,161.915) 242.519,161.915 ccw(c242.979,161.915) U9.1@242.654,161.59
NetR43_2: R43.2 U8.4 U9.2 U9.3 | length 16
  Top Layer w0.254: U8.4@243.036,158.456 ccw(c242.835,158.83) 243.26,158.83 ; U8.4@243.26,157.389 243.26,158.83 ; U8.4@243.484,158.456 cw(c243.685,158.83) 243.26,158.83 ; U9.2@243.654,159.923 cw(c243.329,159.598) 243.789,159.598 cw(c244.249,159.598) U9.2@243.924,159.923 ; U9.2@243.924,160.622 cw(c244.249,160.297) 244.249,160.757 cw(c244.249,161.217) U9.2@243.924,160.891 ; U9.3@244.924,160.622 ccw(c244.599,160.297) 244.599,160.757 ccw(c244.599,161.217) U9.3@244.924,160.891 ; U9.3@244.924,161.59 ccw(c244.599,161.915) 245.059,161.915 ccw(c245.519,161.915) U9.3@245.194,161.59 ; R43.2@248.989,162.474 ccw(c248.352,161.837) 248.352,162.738 ccw(c248.352,163.638) R43.2@248.989,163.002 ; R43.2@249.303,162.738 245.618,162.738 245.059,162.179 U9.3@245.059,160.757 U9.2@243.789,160.757 243.789,159.36 243.26,158.83
NetR46_1: R46.1 U8.1 | length 3.3
  Top Layer w0.254: R46.1@243.256,147.625 243.256,150.885 U8.1@243.26,150.889
NetR48_2: R48.2 U9.4 U12.4 | length 10.6
  Top Layer w0.254: U12.4@248.183,158.374 ccw(c247.376,159.181) 248.518,159.181 ccw(c249.66,159.181) U12.4@248.852,158.374 ; U12.4@248.518,157.389 248.518,160.099 R48.2@249.176,160.757 ; 248.581,160.161 ccw(c247.859,160.884) R48.2@248.88,160.884 ; 248.701,160.282 cw(c249.253,159.731) R48.2@249.253,160.511
  Top Layer w0.38: U9.4@246.329,160.757 R48.2@249.176,160.757 ; 248.198,160.757 ccw(c248.198,161.939) R48.2@249.034,161.103
NetR51_1: R51.1 U12.1 | length 5.8
  Top Layer w0.254: U12.1@248.183,149.905 cw(c247.141,148.862) 248.615,148.862 ; U12.1@248.363,150.084 cw(c247.754,149.475) 248.615,149.475 ; U12.1@248.518,150.889 248.615,150.792 R51.1@248.615,147.625 ; 248.615,149.332 cw(c249.425,149.332) U12.1@248.852,149.905
NetR57_1: R57.1 U7.1 | length 115.3
  Top Layer w0.254: R57.1@119.583,79.175 129.057,79.175 131.67,81.788 174.473,81.788 187.096,94.412 187.096,105.816 206.928,125.648 U7.1@206.928,127.655
NetR58_1: R58.1 U7.3 | length 81.9
  Top Layer w0.254: R58.1@154.483,79.023 165.227,79.023 166.472,80.267 174.73,80.267 188.443,93.98 188.443,105.588 207.928,125.073 U7.3@207.928,127.655
NetR59_1: R59.1 U7.7 | length 56.8
  Top Layer w0.254: R59.1@189.84,79.15 189.84,105.435 209.928,125.524 U7.7@209.928,127.655
NetR60_1: R60.1 U7.17 | length 78.2
  Top Layer w0.254: U7.17@214.928,127.655 214.928,125.432 217.653,122.707 v8(219.177,122.707) ; v8@219.107,122.638 ccw(c218.94,122.471) 218.94,122.707 ccw(c218.94,122.944) v8@219.107,122.777 ; v3@230.739,117.702 cw(c230.508,117.47) 230.835,117.47 ; 230.835,117.513 cw(c231.102,117.513) v3@230.913,117.702 ; v3@230.835,117.789 230.835,85.268 236.75,79.353 R60.1@249.098,79.353
  Bottom Layer w0.254: v8(219.177,122.707) 229.383,122.707 230.826,121.264 v3(230.826,117.789) ; v8@219.246,122.638 cw(c219.413,122.471) 219.413,122.707 cw(c219.413,122.944) v8@219.246,122.777 ; v3@230.739,117.876 ccw(c230.529,118.086) 230.826,118.086 ccw(c231.123,118.086) v3@230.913,117.876
NetR70_1: R70.1 U7.5 | length 65
  Top Layer w0.254: R70.1@172.263,79.124 174.4,79.124 189.179,93.904 189.179,105.537 208.928,125.286 U7.5@208.928,127.655
NetR71_1: R71.1 U7.16 | length 83
  Top Layer w0.254: R71.1@207.391,79.048 224.26,79.048 230.149,84.938 v3(230.149,117.196) ; U7.16@214.428,127.655 214.428,125.144 217.5,122.072 v8(220.04,122.072) ; v8@219.971,122.003 ccw(c219.804,121.836) 219.804,122.072 ccw(c219.804,122.309) v8@219.971,122.142 ; v3@230.062,117.109 cw(c229.852,116.899) 230.149,116.899 cw(c230.446,116.899) v3@230.236,117.109
  Bottom Layer w0.254: v8(220.04,122.072) 229.235,122.072 230.149,121.158 v3(230.149,117.196) ; v8@220.109,122.003 cw(c220.277,121.836) 220.277,122.072 cw(c220.277,122.309) v8@220.109,122.142 ; v3@230.062,117.283 ccw(c229.852,117.493) 230.149,117.493 ccw(c230.446,117.493) v3@230.236,117.283
NetR72_1: R72.1 U7.18 | length 110.8
  Top Layer w0.254: U7.18@215.428,127.655 215.428,125.694 217.78,123.342 v8(219.989,123.342) ; v8@219.92,123.273 ccw(c219.753,123.106) 219.753,123.342 ccw(c219.753,123.579) v8@219.92,123.412 ; v3@231.434,117.109 cw(c231.224,116.899) 231.521,116.899 cw(c231.818,116.899) v3@231.608,117.109 ; v3(231.521,117.196) 231.521,85.547 235.687,81.382 280.241,81.382 R72.1@282.372,79.251
  Bottom Layer w0.254: v8(219.989,123.342) 229.532,123.342 231.521,121.353 v3(231.521,117.196) ; v8@220.059,123.273 cw(c220.226,123.106) 220.226,123.342 cw(c220.226,123.579) v8@220.059,123.412 ; v3@231.434,117.283 ccw(c231.224,117.493) 231.521,117.493 ccw(c231.818,117.493) v3@231.608,117.283
NetR73_1: R73.1 U7.2 | length 98.5
  Top Layer w0.254: R73.1@137.109,79.175 147.091,79.175 149.15,81.234 174.808,81.234 187.833,94.259 187.833,105.766 207.428,125.361 U7.2@207.428,127.655
NetR81_1: R81.1 R82.2 U7.32 | length 91.4
  Top Layer w0.254: v2@204.902,119.13 cw(c204.902,118.833) 205.112,119.043 cw(c205.322,119.253) v2@205.025,119.253 ; v2(204.902,119.253) 205.918,118.237 v2(205.918,109.372) ; v2@205.831,109.459 ccw(c205.621,109.669) 205.918,109.669 ccw(c206.215,109.669) v2@206.005,109.459 ; U7.32@220.528,132.255 227.104,132.255 235.28,124.079 v5(235.28,109.372) ; v5@235.211,109.442 ccw(c235.044,109.609) 235.28,109.609 ccw(c235.517,109.609) v5@235.349,109.442
  Top Layer w0.38: R82.2@195.791,124.774 cw(c195.257,124.241) 196.012,124.241 ; R81.1@195.793,123.485 ccw(c195.263,124.015) 196.012,124.015 ccw(c196.76,124.015) R81.1@196.231,123.485 ; R82.2@196.01,124.993 196.012,124.992 R81.1@196.012,123.266 200.889,123.266 v2(202.133,122.022) ; 196.012,124.249 cw(c196.754,124.249) R82.2@196.229,124.774 ; R81.1@196.281,123.047 cw(c196.81,122.518) 196.81,123.266 cw(c196.81,124.015) R81.1@196.281,123.485
  Bottom Layer w0.254: v2@202.133,121.899 cw(c202.133,121.602) 202.343,121.812 cw(c202.553,122.022) v2@202.256,122.022 ; v2(202.133,122.022) v2(204.902,119.253) ; v2@204.779,119.253 ccw(c204.482,119.253) 204.692,119.463 ccw(c204.902,119.673) v2@204.902,119.376 ; v2(205.918,109.372) v5(235.28,109.372) ; v2@206.005,109.285 cw(c206.215,109.075) 206.215,109.372 cw(c206.215,109.669) v2@206.005,109.459 ; v5@235.211,109.303 ccw(c235.044,109.136) 235.044,109.372 ccw(c235.044,109.609) v5@235.211,109.442
NetR81_2: R81.2 U22.2 | length 3.4
  Top Layer w0.38: R81.2@194.093,123.047 cw(c193.568,122.522) 194.31,122.522 ; U22.2@194.31,121.016 194.31,123.264 R81.2@194.312,123.266 ; 194.31,122.513 cw(c195.065,122.513) R81.2@194.531,123.047
NetR84_1: R84.1 U27.1 | length 10.6
  Top Layer w0.38: R84.1@153.019,178.571 cw(c152.49,178.042) 153.238,178.042 cw(c153.987,178.042) R84.1@153.457,178.571 ; R84.1@153.238,178.791 153.238,175.514 154.783,173.969 U27.1@157.213,173.969 ; U27.1@156.273,173.679 ccw(c155.573,172.979) 155.573,173.969 ccw(c155.573,174.959) U27.1@156.273,174.259
NetR85_1: R85.1 U27.4 U30.21 | length 21.6
  Top Layer w0.38: U30.21@135.592,180.052 136.559,180.052 ; U30.21@136.262,179.856 cw(c136.559,179.729) 136.559,180.052 ; U30.21@136.262,180.248 ccw(c136.559,180.375) 136.559,180.052 ; R85.1@152.933,171.679 152.933,171.748 U27.4@150.713,173.969 150.11,173.969 146.437,177.642 138.969,177.642 136.559,180.052